# EAGLE board combined (EAGLE 5.11)
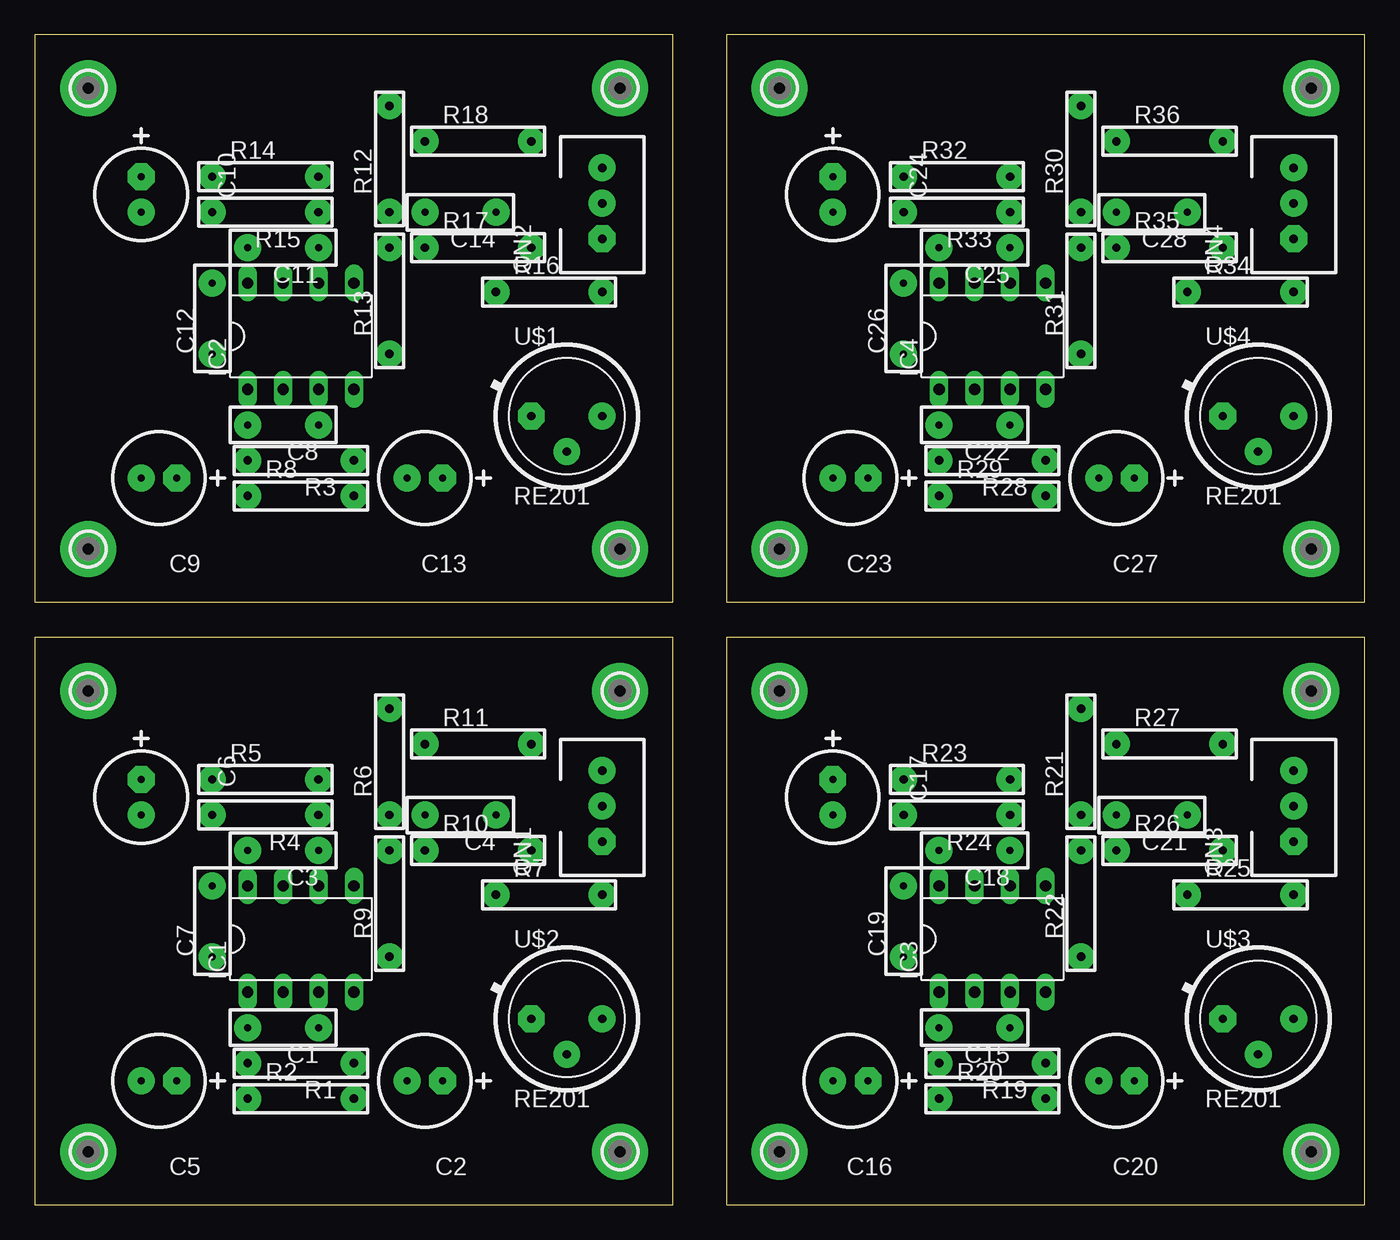
[diagram p0: board, top side]
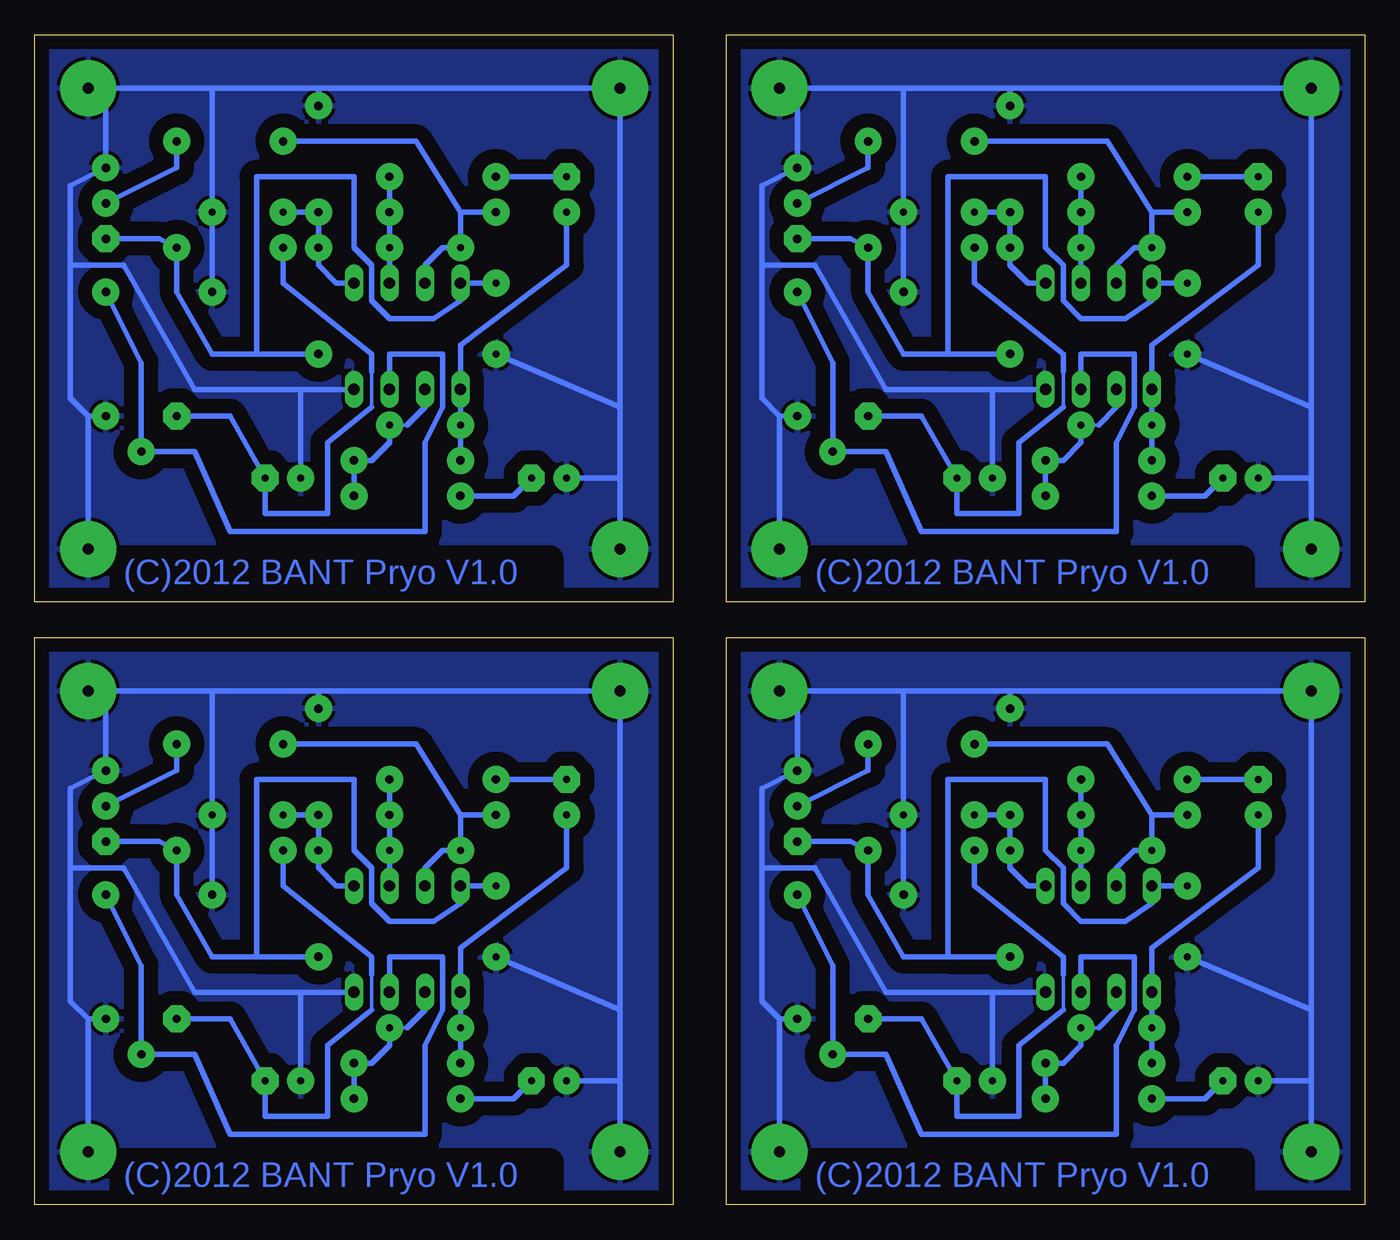
[diagram p1: board, bottom side, seen from below]

Size 95.25 x 83.82 mm. Coordinates in mm from the lower left corner, seen from the top.
Outline: 0,0 45.72,0 45.72,40.64 0,40.64 0,0
Outline: 0,43.18 45.72,43.18 45.72,83.82 0,83.82 0,43.18
Outline: 49.53,0 95.25,0 95.25,40.64 49.53,40.64 49.53,0
Outline: 49.53,43.18 95.25,43.18 95.25,83.82 49.53,83.82 49.53,43.18
Copper layers (1*16): Top 0.035mm / dielectric 1.5mm / Bottom 0.035mm
Design rules "default": minimum track width 10mil, minimum drill 24mil, track to track 8mil, track to pad 8mil, pad to pad 8mil, via to via 8mil, smd to smd 8mil, copper to edge 40mil, drill to drill 8mil, minimum pad ring 10mil, minimum via ring 8mil, stop-mask expansion 4mil, vias tented up to drill 0mil, thermal gap 10mil

## Footprints (pad centres in the part's own frame; a part is rotated, then mirrored left to right if it is on the bottom)
CAP_DIP_2 = drill 0.5 pad 1.93 round: 1 -2.54,0; 2 2.54,0
CCAP_6.5 = drill 0.5 pad 1.93 octagon: + -1.27,0 | drill 0.5 pad 1.93 round: - 1.27,0
CON_HRS_DIP_3 = drill 0.6 pad 1.93 octagon: 1 -2.54,0 | drill 0.6 pad 1.93 round: 2 0,0; 3 2.54,0
DIL08 = drill 0.813 long: 1 -3.81,-3.81; 2 -1.27,-3.81; 3 1.27,-3.81; 4 3.81,-3.81; 5 3.81,3.81; 6 1.27,3.81; 7 -1.27,3.81; 8 -3.81,3.81
PAD-2.1 = drill 0.8 pad 4 round: B2,1 0,0
R_0.125W_3 = drill 0.6 pad 1.93 round: 1 -3.81,0; 2 3.81,0
RE210 = drill 0.6 pad 1.93 octagon: 1 -2.54,0 | drill 0.6 pad 1.93 round: 2 0,-2.54; 3 2.54,0

## Placement (x,y rotation side)
C1  0.01uF  [CAP_DIP_2]  17.78,12.7 180 top
C2  10uF  [CCAP_6.5]  27.94,8.89 180 top
C3  0.01uF  [CAP_DIP_2]  17.78,25.4 180 top
C4  0.1uF  [CAP_DIP_2]  30.48,27.94 180 top
C5  47uF  [CCAP_6.5]  8.89,8.89 180 top
C6  47uF  [CCAP_6.5]  7.62,29.21 270 top
C7  0.1uF  [CAP_DIP_2]  12.7,20.32 90 top
C8  0.01uF  [CAP_DIP_2]  17.78,55.88 180 top
C9  47uF  [CCAP_6.5]  8.89,52.07 180 top
C10  47uF  [CCAP_6.5]  7.62,72.39 270 top
C11  0.01uF  [CAP_DIP_2]  17.78,68.58 180 top
C12  0.1uF  [CAP_DIP_2]  12.7,63.5 90 top
C13  10uF  [CCAP_6.5]  27.94,52.07 180 top
C14  0.1uF  [CAP_DIP_2]  30.48,71.12 180 top
C15  0.01uF  [CAP_DIP_2]  67.31,12.7 180 top
C16  47uF  [CCAP_6.5]  58.42,8.89 180 top
C17  47uF  [CCAP_6.5]  57.15,29.21 270 top
C18  0.01uF  [CAP_DIP_2]  67.31,25.4 180 top
C19  0.1uF  [CAP_DIP_2]  62.23,20.32 90 top
C20  10uF  [CCAP_6.5]  77.47,8.89 180 top
C21  0.1uF  [CAP_DIP_2]  80.01,27.94 180 top
C22  0.01uF  [CAP_DIP_2]  67.31,55.88 180 top
C23  47uF  [CCAP_6.5]  58.42,52.07 180 top
C24  47uF  [CCAP_6.5]  57.15,72.39 270 top
C25  0.01uF  [CAP_DIP_2]  67.31,68.58 180 top
C26  0.1uF  [CAP_DIP_2]  62.23,63.5 90 top
C27  10uF  [CCAP_6.5]  77.47,52.07 180 top
C28  0.1uF  [CAP_DIP_2]  80.01,71.12 180 top
CN1  [CON_HRS_DIP_3]  40.64,28.57 90 top
CN2  [CON_HRS_DIP_3]  40.64,71.75 90 top
CN3  [CON_HRS_DIP_3]  90.17,28.57 90 top
CN4  [CON_HRS_DIP_3]  90.17,71.75 90 top
IC1  LM358N  [DIL08]  19.05,19.05 0 top
IC2  LM358N  [DIL08]  19.05,62.23 0 top
IC3  LM358N  [DIL08]  68.58,19.05 0 top
IC4  LM358N  [DIL08]  68.58,62.23 0 top
MP1  MOUNT-PAD2.1  [PAD-2.1]  3.81,36.83 0 top
MP2  MOUNT-PAD2.1  [PAD-2.1]  41.91,36.83 0 top
MP3  MOUNT-PAD2.1  [PAD-2.1]  41.91,3.81 0 top
MP4  MOUNT-PAD2.1  [PAD-2.1]  3.81,3.81 0 top
MP5  MOUNT-PAD2.1  [PAD-2.1]  3.81,80.01 0 top
MP6  MOUNT-PAD2.1  [PAD-2.1]  41.91,80.01 0 top
MP7  MOUNT-PAD2.1  [PAD-2.1]  41.91,46.99 0 top
MP8  MOUNT-PAD2.1  [PAD-2.1]  3.81,46.99 0 top
MP9  MOUNT-PAD2.1  [PAD-2.1]  53.34,36.83 0 top
MP10  MOUNT-PAD2.1  [PAD-2.1]  91.44,36.83 0 top
MP11  MOUNT-PAD2.1  [PAD-2.1]  91.44,3.81 0 top
MP12  MOUNT-PAD2.1  [PAD-2.1]  53.34,3.81 0 top
MP13  MOUNT-PAD2.1  [PAD-2.1]  53.34,80.01 0 top
MP14  MOUNT-PAD2.1  [PAD-2.1]  91.44,80.01 0 top
MP15  MOUNT-PAD2.1  [PAD-2.1]  91.44,46.99 0 top
MP16  MOUNT-PAD2.1  [PAD-2.1]  53.34,46.99 0 top
R1  1M  [R_0.125W_3]  19.05,10.16 180 top
R2  10K  [R_0.125W_3]  19.05,7.62 0 top
R3  1M  [R_0.125W_3]  19.05,53.34 180 top
R4  1M  [R_0.125W_3]  16.51,27.94 180 top
R5  47K  [R_0.125W_3]  16.51,30.48 0 top
R6  4.7K  [R_0.125W_3]  25.4,31.75 90 top
R7  47K  [R_0.125W_3]  36.83,22.23 0 top
R8  10K  [R_0.125W_3]  19.05,50.8 0 top
R9  4.7K  [R_0.125W_3]  25.4,21.59 90 top
R10  10K  [R_0.125W_3]  31.75,25.4 0 top
R11  1K  [R_0.125W_3]  31.75,33.02 0 top
R12  4.7K  [R_0.125W_3]  25.4,74.93 90 top
R13  4.7K  [R_0.125W_3]  25.4,64.77 90 top
R14  47K  [R_0.125W_3]  16.51,73.66 0 top
R15  1M  [R_0.125W_3]  16.51,71.12 180 top
R16  47K  [R_0.125W_3]  36.83,65.41 0 top
R17  10K  [R_0.125W_3]  31.75,68.58 0 top
R18  1K  [R_0.125W_3]  31.75,76.2 0 top
R19  1M  [R_0.125W_3]  68.58,10.16 180 top
R20  10K  [R_0.125W_3]  68.58,7.62 0 top
R21  4.7K  [R_0.125W_3]  74.93,31.75 90 top
R22  4.7K  [R_0.125W_3]  74.93,21.59 90 top
R23  47K  [R_0.125W_3]  66.04,30.48 0 top
R24  1M  [R_0.125W_3]  66.04,27.94 180 top
R25  47K  [R_0.125W_3]  86.36,22.23 0 top
R26  10K  [R_0.125W_3]  81.28,25.4 0 top
R27  1K  [R_0.125W_3]  81.28,33.02 0 top
R28  1M  [R_0.125W_3]  68.58,53.34 180 top
R29  10K  [R_0.125W_3]  68.58,50.8 0 top
R30  4.7K  [R_0.125W_3]  74.93,74.93 90 top
R31  4.7K  [R_0.125W_3]  74.93,64.77 90 top
R32  47K  [R_0.125W_3]  66.04,73.66 0 top
R33  1M  [R_0.125W_3]  66.04,71.12 180 top
R34  47K  [R_0.125W_3]  86.36,65.41 0 top
R35  10K  [R_0.125W_3]  81.28,68.58 0 top
R36  1K  [R_0.125W_3]  81.28,76.2 0 top
U$1  RE201  [RE210]  38.1,56.52 0 top
U$2  RE201  [RE210]  38.1,13.34 0 top
U$3  RE201  [RE210]  87.63,13.34 0 top
U$4  RE201  [RE210]  87.63,56.52 0 top

## Library data of the parts
C1-C28 CN1-CN4 MP1-MP16 R1-R36 = MyLib
IC1-IC4 = linear4
U$1-U$4 = akizuki

## Nets
N$1: IC1.3 R7.2 U$2.2
N$2: C1.1 IC1.2 R1.1 R2.2
N$3: C5.+ R2.1
N$4: IC2.3 R16.2 U$1.2
N$5: C8.1 IC2.2 R3.1 R8.2
N$6: C2.+ R10.1 U$2.1
N$7: C4.2 IC1.5 R6.1 R9.2
N$8: C1.2 C6.- IC1.1 R1.2
N$9: C6.+ R5.1
N$10: CN1.2 R11.2
N$11: C3.1 IC1.6 R4.1 R5.2
N$12: C14.2 IC2.5 R12.1 R13.2
N$13: C3.2 IC1.7 R4.2 R11.1
N$14: C10.+ R14.1
N$15: C11.1 IC2.6 R14.2 R15.1
N$16: C11.2 IC2.7 R15.2 R18.1
N$17: C8.2 C10.- IC2.1 R3.2
N$18: C13.+ R17.1 U$1.1
N$19: CN2.2 R18.2
N$20: C9.+ R8.1
N$21: IC3.3 R25.2 U$3.2
N$22: C15.1 IC3.2 R19.1 R20.2
N$23: C21.2 IC3.5 R21.1 R22.2
N$24: C17.+ R23.1
N$25: C18.1 IC3.6 R23.2 R24.1
N$26: C18.2 IC3.7 R24.2 R27.1
N$27: C15.2 C17.- IC3.1 R19.2
N$28: C20.+ R26.1 U$3.1
N$29: CN3.2 R27.2
N$30: C16.+ R20.1
N$31: IC4.3 R34.2 U$4.2
N$32: C22.1 IC4.2 R28.1 R29.2
N$33: C28.2 IC4.5 R30.1 R31.2
N$34: C24.+ R32.1
N$35: C25.1 IC4.6 R32.2 R33.1
N$36: C25.2 IC4.7 R33.2 R36.1
N$37: C22.2 C24.- IC4.1 R28.2
N$38: C27.+ R35.1 U$4.1
N$39: CN4.2 R36.2
N$40: C23.+ R29.1
V+: C7.2 CN1.1 IC1.8 R9.1 R10.2
V+1: C12.2 CN2.1 IC2.8 R13.1 R17.2
V+2: C19.2 CN3.1 IC3.8 R22.1 R26.2
V+3: C26.2 CN4.1 IC4.8 R31.1 R35.2
V-: C2.- C4.1 C5.- C7.1 CN1.3 IC1.4 MP1.B2,1 MP2.B2,1 MP3.B2,1 MP4.B2,1 R6.2 R7.1 U$2.3
V-1: C9.- C12.1 C13.- C14.1 CN2.3 IC2.4 MP5.B2,1 MP6.B2,1 MP7.B2,1 MP8.B2,1 R12.2 R16.1 U$1.3
V-2: C16.- C19.1 C20.- C21.1 CN3.3 IC3.4 MP9.B2,1 MP10.B2,1 MP11.B2,1 MP12.B2,1 R21.2 R25.1 U$3.3
V-3: C23.- C26.1 C27.- C28.1 CN4.3 IC4.4 MP13.B2,1 MP14.B2,1 MP15.B2,1 MP16.B2,1 R30.2 R34.1 U$4.3

## Tracks (layer width: path | path; a pad name or v marks a point on that pad's centre or on a via)
N$1
  Bottom 0.406: IC1.3 20.32,17.78 16.51,17.78 16.51,13.97 17.78,11.43 17.78,5.08 31.75,5.08 34.29,10.79 U$2.2 38.1,17.14 R7.2
N$2
  Bottom 0.254: C1.1 19.05,12.7
  Bottom 0.406: R2.2 R1.1 21.59,10.16 20.32,11.43 C1.1 | 19.05,12.7 17.78,13.97 IC1.2
N$3
  Bottom 0.406: R2.1 11.43,7.62 C5.+
N$4
  Bottom 0.406: IC2.3 20.32,60.96 16.51,60.96 16.51,57.15 17.78,54.61 17.78,48.26 31.75,48.26 34.29,53.98 U$1.2 38.1,60.33 R16.2
N$5
  Bottom 0.254: C8.1 19.05,55.88
  Bottom 0.406: R8.2 R3.1 21.59,53.34 20.32,54.61 C8.1 | 19.05,55.88 17.78,57.15 IC2.2
N$6
  Bottom 0.254: 21.59,13.97 21.59,16.51
  Bottom 0.406: U$2.1 31.75,13.34 C2.+ 29.21,6.35 24.77,6.35 24.77,11.43 21.59,13.97 | R10.1 27.94,22.86 21.59,17.78 21.59,16.51
N$7
  Bottom 0.406: C4.2 R6.1 R9.2 25.4,24.13 24.13,22.86 IC1.5
N$8
  Bottom 0.406: R1.2 C1.2 IC1.1 15.24,18.41 7.62,24.13 C6.-
N$9
  Bottom 0.406: C6.+ R5.1
N$10
  Bottom 0.406: R11.2 35.56,31.11 CN1.2
N$11
  Bottom 0.406: IC1.6 C3.1 R4.1 R5.2
N$12
  Bottom 0.406: C14.2 R12.1 R13.2 25.4,67.31 24.13,66.04 IC2.5
N$13
  Bottom 0.406: IC1.7 17.78,24.13 16.51,25.4 C3.2 15.24,27.94 | R4.2 15.24,27.94 | R11.1 18.41,33.02 15.24,27.94
N$14
  Bottom 0.406: C10.+ R14.1
N$15
  Bottom 0.406: IC2.6 C11.1 R15.1 R14.2
N$16
  Bottom 0.406: IC2.7 17.78,67.31 16.51,68.58 C11.2 15.24,71.12 | R15.2 15.24,71.12 | R18.1 18.41,76.2 15.24,71.12
N$17
  Bottom 0.406: R3.2 C8.2 IC2.1 15.24,61.59 7.62,67.31 C10.-
N$18
  Bottom 0.254: 21.59,57.15 21.59,59.69
  Bottom 0.406: U$1.1 31.75,56.52 C13.+ 29.21,49.53 24.77,49.53 24.77,54.61 21.59,57.15 | R17.1 27.94,66.04 21.59,60.96 21.59,59.69
N$19
  Bottom 0.406: R18.2 35.56,74.3 CN2.2
N$20
  Bottom 0.406: R8.1 11.43,50.8 C9.+
N$21
  Bottom 0.406: IC3.3 69.85,17.78 66.04,17.78 66.04,13.97 67.31,11.43 67.31,5.08 81.28,5.08 83.82,10.79 U$3.2 87.63,17.14 R25.2
N$22
  Bottom 0.254: C15.1 68.58,12.7
  Bottom 0.406: R20.2 R19.1 71.12,10.16 69.85,11.43 C15.1 | 68.58,12.7 67.31,13.97 IC3.2
N$23
  Bottom 0.406: C21.2 R21.1 R22.2 74.93,24.13 73.66,22.86 IC3.5
N$24
  Bottom 0.406: C17.+ R23.1
N$25
  Bottom 0.406: IC3.6 C18.1 R24.1 R23.2
N$26
  Bottom 0.406: IC3.7 67.31,24.13 66.04,25.4 C18.2 64.77,27.94 | R24.2 64.77,27.94 | R27.1 67.94,33.02 64.77,27.94
N$27
  Bottom 0.406: R19.2 C15.2 IC3.1 64.77,18.41 57.15,24.13 C17.-
N$28
  Bottom 0.254: 71.12,13.97 71.12,16.51
  Bottom 0.406: U$3.1 81.28,13.34 C20.+ 78.74,6.35 74.3,6.35 74.3,11.43 71.12,13.97 | R26.1 77.47,22.86 71.12,17.78 71.12,16.51
N$29
  Bottom 0.406: R27.2 85.09,31.11 CN3.2
N$30
  Bottom 0.406: R20.1 60.96,7.62 C16.+
N$31
  Bottom 0.406: IC4.3 69.85,60.96 66.04,60.96 66.04,57.15 67.31,54.61 67.31,48.26 81.28,48.26 83.82,53.98 U$4.2 87.63,60.33 R34.2
N$32
  Bottom 0.254: C22.1 68.58,55.88
  Bottom 0.406: R29.2 R28.1 71.12,53.34 69.85,54.61 C22.1 | 68.58,55.88 67.31,57.15 IC4.2
N$33
  Bottom 0.406: C28.2 R30.1 R31.2 74.93,67.31 73.66,66.04 IC4.5
N$34
  Bottom 0.406: C24.+ R32.1
N$35
  Bottom 0.406: IC4.6 C25.1 R33.1 R32.2
N$36
  Bottom 0.406: IC4.7 67.31,67.31 66.04,68.58 C25.2 64.77,71.12 | R33.2 64.77,71.12 | R36.1 67.94,76.2 64.77,71.12
N$37
  Bottom 0.406: R28.2 C22.2 IC4.1 64.77,61.59 57.15,67.31 C24.-
N$38
  Bottom 0.254: 71.12,57.15 71.12,59.69
  Bottom 0.406: U$4.1 81.28,56.52 C27.+ 78.74,49.53 74.3,49.53 74.3,54.61 71.12,57.15 | R35.1 77.47,66.04 71.12,60.96 71.12,59.69
N$39
  Bottom 0.406: R36.2 85.09,74.3 CN4.2
N$40
  Bottom 0.406: R29.1 60.96,50.8 C23.+
V+
  Bottom 0.406: C7.2 IC1.8 15.24,21.59 17.14,20.32 20.32,20.32 21.59,21.59 21.59,24.13 22.86,25.4 22.86,30.48 29.84,30.48 29.84,17.78 | 29.84,17.78 33.02,17.78 35.56,22.23 R10.2 36.83,26.04 CN1.1 | 29.84,17.78 R9.1
V+1
  Bottom 0.406: C12.2 IC2.8 15.24,64.77 17.14,63.5 20.32,63.5 21.59,64.77 21.59,67.31 22.86,68.58 22.86,73.66 29.84,73.66 29.84,60.96 | 29.84,60.96 33.02,60.96 35.56,65.41 R17.2 36.83,69.22 CN2.1 | 29.84,60.96 R13.1
V+2
  Bottom 0.406: C19.2 IC3.8 64.77,21.59 66.67,20.32 69.85,20.32 71.12,21.59 71.12,24.13 72.39,25.4 72.39,30.48 79.38,30.48 79.38,17.78 | 79.38,17.78 82.55,17.78 85.09,22.23 R26.2 86.36,26.04 CN3.1 | 79.38,17.78 R22.1
V+3
  Bottom 0.406: C26.2 IC4.8 64.77,64.77 66.67,63.5 69.85,63.5 71.12,64.77 71.12,67.31 72.39,68.58 72.39,73.66 79.38,73.66 79.38,60.96 | 79.38,60.96 82.55,60.96 85.09,65.41 R35.2 86.36,69.22 CN4.1 | 79.38,60.96 R31.1
V-
  Bottom 0.254: MP4.B2,1 5.08,3.81
  Bottom 0.406: R7.1 C4.1 33.02,36.83 | 3.81,13.97 C7.1 | MP4.B2,1 3.81,8.89 | 3.81,8.89 C5.- | 43.18,24.13 43.18,29.84 CN1.3 40.64,36.83 | 43.18,24.13 39.37,24.13 34.29,15.24 26.67,15.24 | 26.67,15.24 IC1.4 | 26.67,15.24 C2.- | 25.4,36.83 MP1.B2,1 3.81,13.97 | 25.4,36.83 33.02,36.83 | 33.02,36.83 40.64,36.83 | 40.64,36.83 MP2.B2,1 | 25.4,36.83 R6.2 | 3.81,8.89 3.81,13.97 | 41.91,13.34 MP3.B2,1 | 41.91,13.34 U$2.3 | 41.91,13.34 43.18,14.61 43.18,24.13
  pour Bottom (isolate 1.016): 0,40.64 0,0 45.72,0 45.72,40.64
V-1
  Bottom 0.254: MP8.B2,1 5.08,46.99
  Bottom 0.406: R16.1 C14.1 33.02,80.01 | 3.81,57.15 C12.1 | MP8.B2,1 3.81,52.07 | 3.81,52.07 C9.- | 43.18,67.31 43.18,73.03 CN2.3 40.64,80.01 | 43.18,67.31 39.37,67.31 34.29,58.42 26.67,58.42 | 26.67,58.42 IC2.4 | 26.67,58.42 C13.- | 25.4,80.01 MP5.B2,1 3.81,57.15 | 25.4,80.01 33.02,80.01 | 33.02,80.01 40.64,80.01 | 40.64,80.01 MP6.B2,1 | 25.4,80.01 R12.2 | 3.81,52.07 3.81,57.15 | 41.91,56.52 MP7.B2,1 | 41.91,56.52 U$1.3 | 41.91,56.52 43.18,57.78 43.18,67.31
  pour Bottom (isolate 1.016): 0,83.82 0,43.18 45.72,43.18 45.72,83.82
V-2
  Bottom 0.254: MP12.B2,1 54.61,3.81
  Bottom 0.406: R25.1 C21.1 82.55,36.83 | 53.34,13.97 C19.1 | MP12.B2,1 53.34,8.89 | 53.34,8.89 C16.- | 92.71,24.13 92.71,29.84 CN3.3 90.17,36.83 | 92.71,24.13 88.9,24.13 83.82,15.24 76.2,15.24 | 76.2,15.24 IC3.4 | 76.2,15.24 C20.- | 74.93,36.83 MP9.B2,1 53.34,13.97 | 74.93,36.83 82.55,36.83 | 82.55,36.83 90.17,36.83 | 90.17,36.83 MP10.B2,1 | 74.93,36.83 R21.2 | 53.34,8.89 53.34,13.97 | 91.44,13.34 MP11.B2,1 | 91.44,13.34 U$3.3 | 91.44,13.34 92.71,14.61 92.71,24.13
  pour Bottom (isolate 1.016): 49.53,40.64 49.53,0 95.25,0 95.25,40.64
V-3
  Bottom 0.254: MP16.B2,1 54.61,46.99
  Bottom 0.406: R34.1 C28.1 82.55,80.01 | 53.34,57.15 C26.1 | MP16.B2,1 53.34,52.07 | 53.34,52.07 C23.- | 92.71,67.31 92.71,73.03 CN4.3 90.17,80.01 | 92.71,67.31 88.9,67.31 83.82,58.42 76.2,58.42 | 76.2,58.42 IC4.4 | 76.2,58.42 C27.- | 74.93,80.01 MP13.B2,1 53.34,57.15 | 74.93,80.01 82.55,80.01 | 82.55,80.01 90.17,80.01 | 90.17,80.01 MP14.B2,1 | 74.93,80.01 R30.2 | 53.34,52.07 53.34,57.15 | 91.44,56.52 MP15.B2,1 | 91.44,56.52 U$4.3 | 91.44,56.52 92.71,57.78 92.71,67.31
  pour Bottom (isolate 1.016): 49.53,83.82 49.53,43.18 95.25,43.18 95.25,83.82

## Text on the board
Bottom: (C)2012 BANT Pryo V1.0 | (C)2012 BANT Pryo V1.0 | (C)2012 BANT Pryo V1.0 | (C)2012 BANT Pryo V1.0